# Altium PCB Control.PcbDoc
Units mm, origin at the board's own origin, x right, y up, seen from the top; angles counter-clockwise.
Board outline 152.4 x 101.6 mm, 2 copper layers (Top Layer, Bottom Layer), stack 1.569 mm thick; 43 components, 36 nets, 137 pads, 0 vias.
Unrouted connection lines stored in the file: 91.
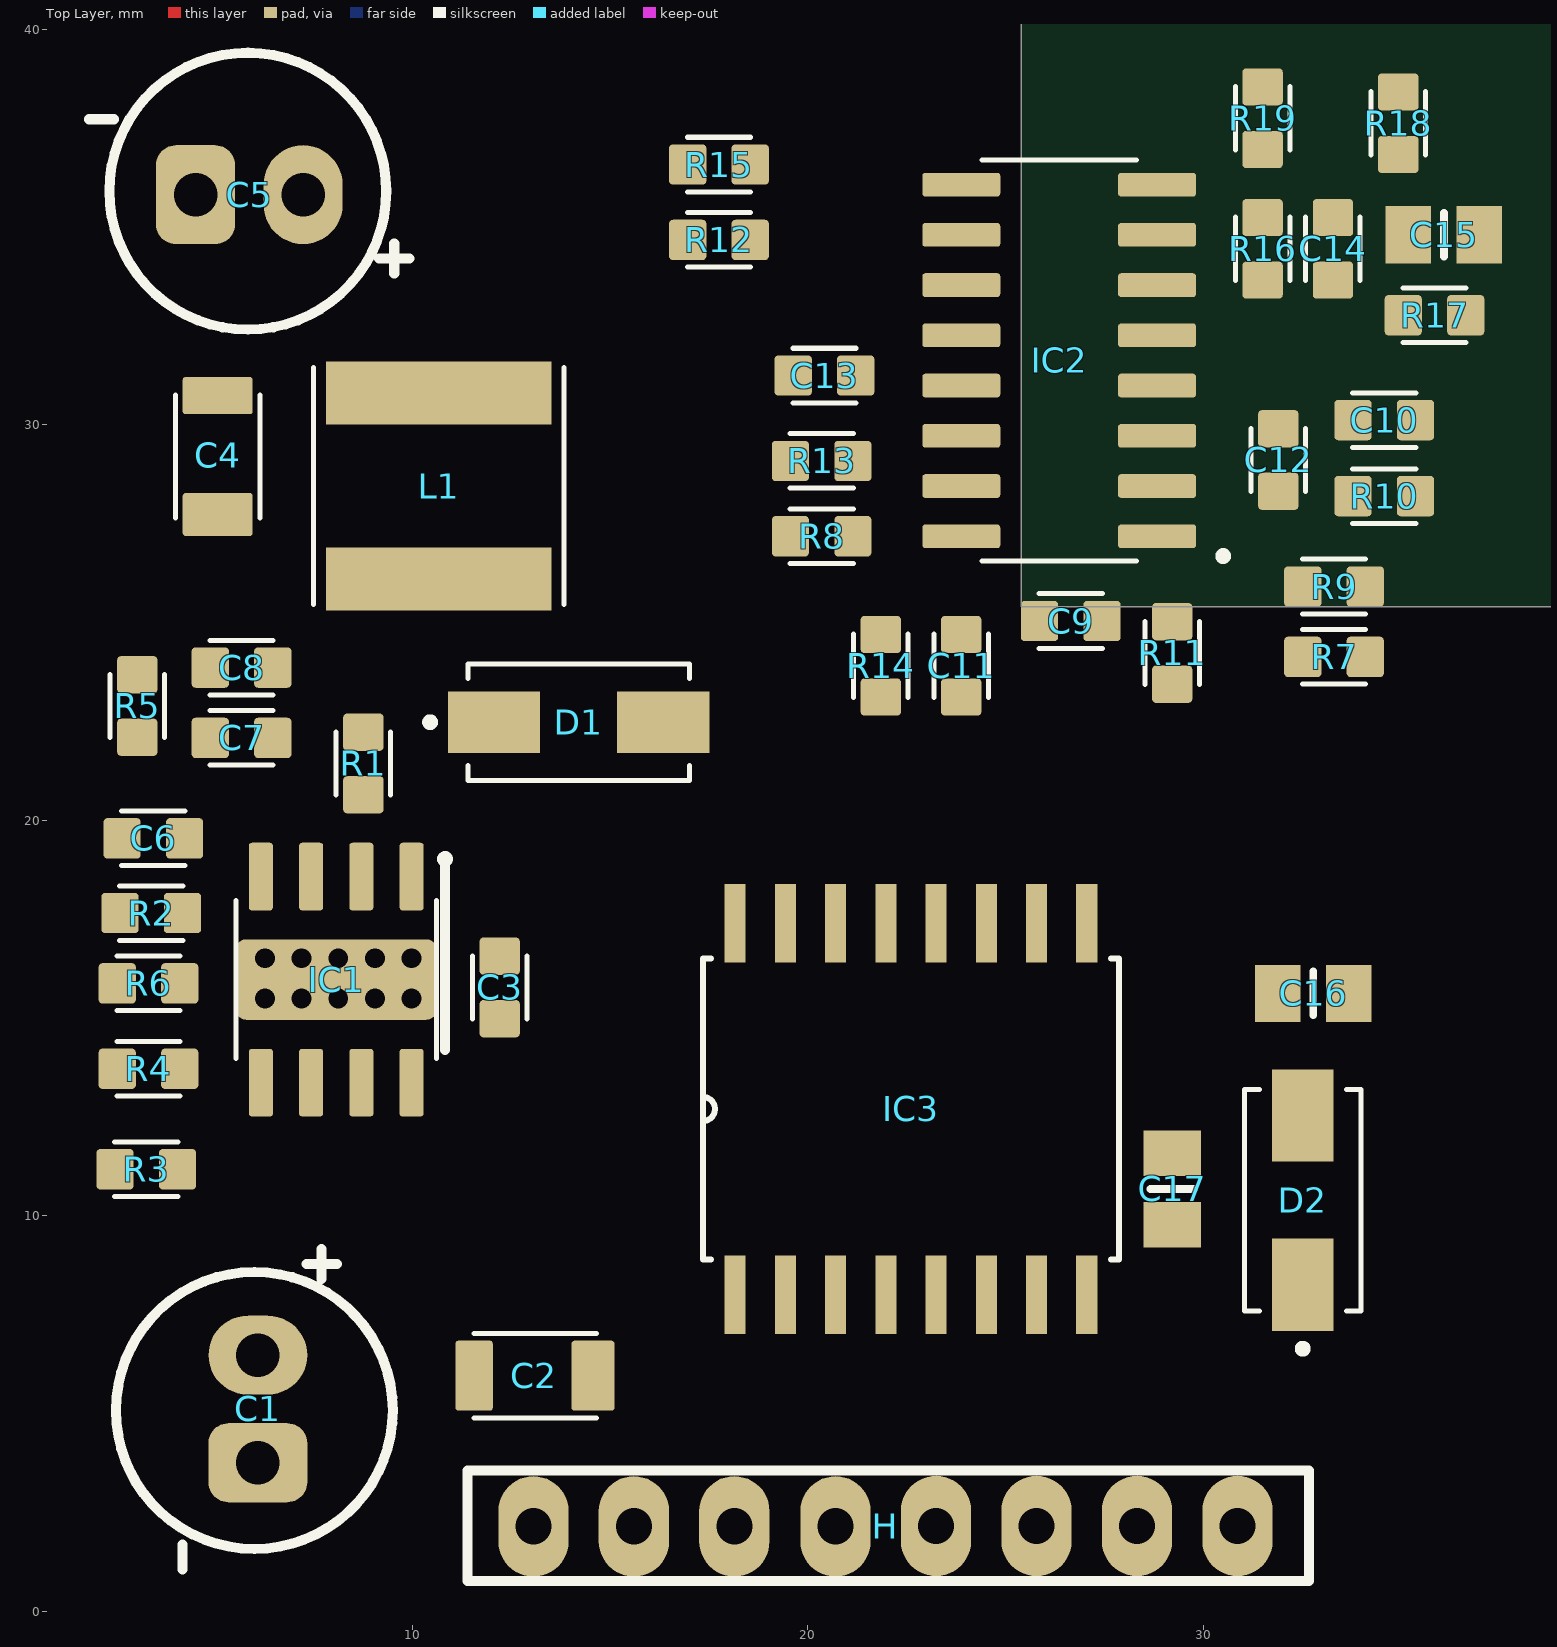
[diagram p0: Top Layer view]
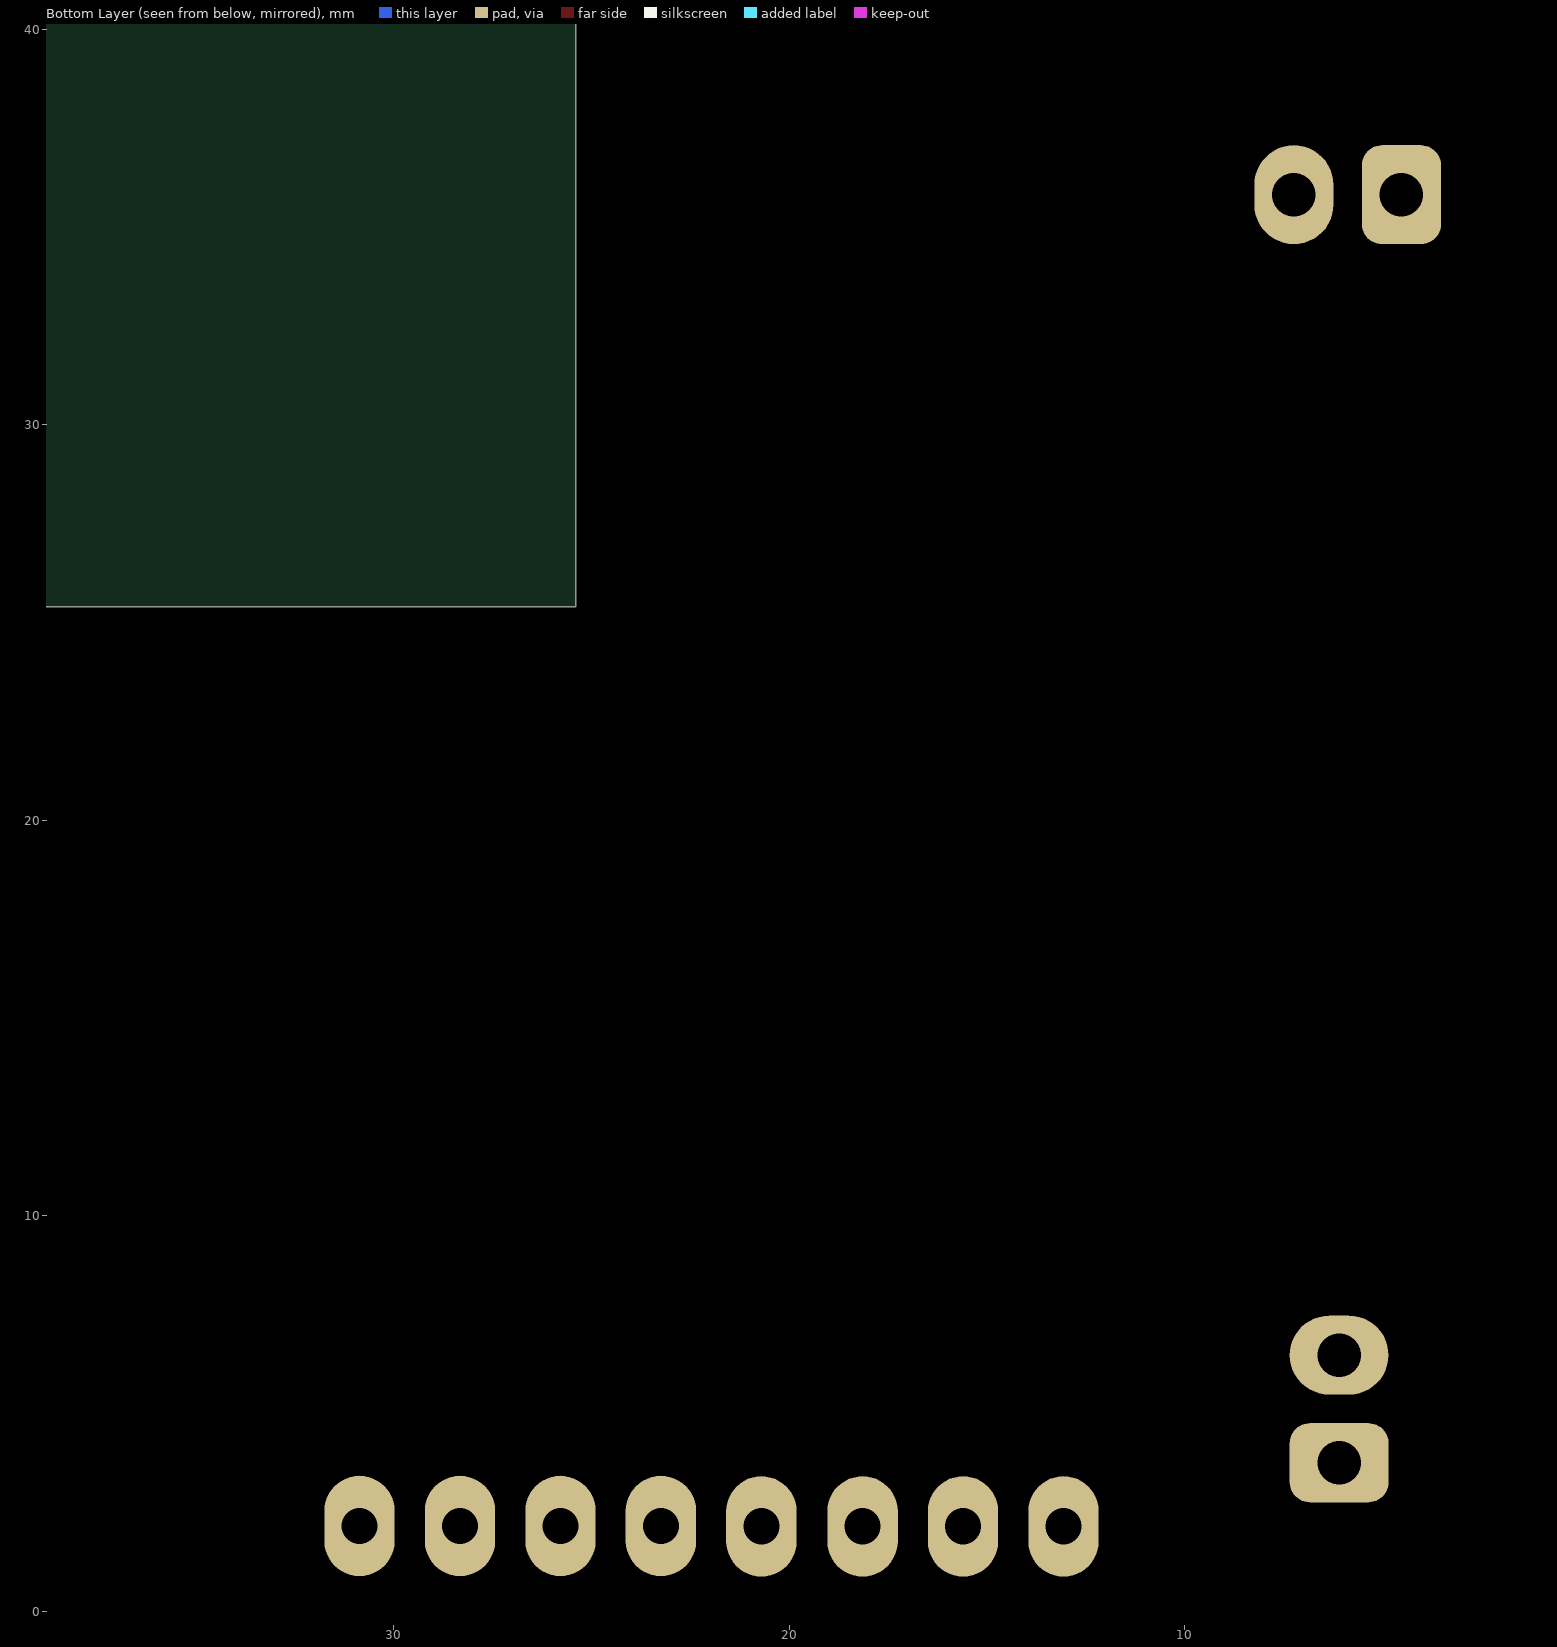
[diagram p1: Bottom Layer view, seen from below]

## Layer stack, top to bottom
Top Solder: solder mask 0.0254, SM-001, Dk 4
Top Layer: signal copper 0.035
Dielectric 1: core 1.4986, Core-043, Dk 4.3
Bottom Layer: signal copper 0.035
Bottom Solder: solder mask 0.0254, SM-001, Dk 4

## Board outline
25.4,25.4 177.8,25.4 177.8,127 25.4,127

## Design rules (kind name [scope] priority, off if disabled: settings)
Clearance [All] p1: gap=0.254 ignorepadtopadclearanceinfootprint=FALSE except(0: Arc-Hole Track-Hole SMDPad-Hole THPad-Hole Via-Hole Fill-Hole Poly-Hole Region-Hole Text-Hole)
PolygonConnect [All] p1: connectstyle=Relief reliefconductorwidth=0.254 reliefentries=4 polygonreliefangle="90 Angle" airgapwidth=0.254
RoutingVias [All] p1: holewidth=0.711 width=1.27 viastyle="Through Hole" minholewidth=0.711 minwidth=1.27 maxholewidth=0.711 maxwidth=1.27
SolderMaskExpansion [All] p1: expansion=0.102 istentingtop=FALSE
Width [All] p1: maxlimit=0.254 minlimit=0.254 preferedwidth=0.254
30 further rules are at their usual default settings.

## Classes and differential pairs
component class U_TL494: C9 C10 C11 C12 C13 C14 C15 IC2 R7 R8 R9 R10 R11 R12 R13 R14 R15 R16 R17 R18 R19
component class U_power: C1 C2 C3 C4 C5 C6 C7 C8 D1 IC1 L1 R1 R2 R3 R4 R5 R6
component class U_GATE_DRIVE: C16 C17 D2 IC3
component class Control: H

## Components (designator, comment, footprint, x,y, rotation, side; value= is the part's Value field where it differs from the comment)
C1 "100uf/35v" cap/330u/16v 6.096,3.757 r90 top
C2 "10uF" CAP-1206 13.081,6.096 r180 top
C3 "100nF" CAP-0603 12.192,15.875 r90 top
C4 "22uF" CAP-1206 5.219,29.217 r90 top
C5 "100uF" cap/330u/16v 4.519,35.814 r0 top
C6 "NU" CAP-0603 3.556,19.558 r0 top
C7 "100pF" CAP-0603 5.786,22.098 r0 top
C8 "NU" CAP-0603 5.786,23.876 r0 top
C9 "10nF" CAP-0603 26.543,25.019 r180 top
C10 "1uF" CAP-0603 34.469,30.099 r180 top
C11 "10nF" CAP-0603 23.859,24.007 r90 top
C12 "13pF" CAP-0603 31.877,29.21 r90 top
C13 "100nF" CAP-0603 20.522,31.259 r0 top
C14 "1nF" CAP-0603 33.291,34.342 r270 top
C15 "1uF" CAP-0805 37.004,34.776 r180 top
C16 "100nF" CAP-0805 31.852,15.643 r0 top
C17 "4.7uF" CAP-0805 29.232,11.604 r270 top
D1 "DSK310" DIOD/1N4007/SMD 12.046,22.479 r0 top
D2 "US1M" DIOD/1N4007/SMD 32.512,8.236 r90 top
H "pin_header_8pin" pin_header8 30.777,2.149 r180 top
IC1 "MP4560DN" SOP8_HIT 9.944,18.542 r270 top
IC2 "TL494" TL494_SMD 26.185,32.004 r180 top
IC3 "ir2113" ir2113 22.606,12.7 r90 top
L1 "68uH" NR6028T680 10.668,28.448 r90 top
R1 "47K" RES/0603 8.763,21.336 r270 top
R2 "220K" RES/0603 3.302,17.653 r180 top
R3 "220K" RES/0603 3.175,11.176 r180 top
R4 "42.2K" RES/0603 3.429,13.716 r0 top
R5 "47K" RES/0603 3.048,22.987 r90 top
R6 "42.2K" RES/0603 3.429,15.875 r0 top
R7 "5.6K" RES/0603 33.401,24.13 r0 top
R8 "1K" RES/0603 20.447,27.178 r0 top
R9 "5.6K" RES/0603 33.401,25.908 r0 top
R10 "120k" RES/0603 34.671,28.194 r0 top
R11 "5.6K" RES/0603 29.21,24.13 r270 top
R12 "1K" RES/0603 17.653,34.671 r180 top
R13 "68K" RES/0603 20.447,29.083 r0 top
R14 "680R" RES/0603 21.844,24.003 r90 top
R15 "1K" RES/0603 17.851,36.576 r0 top
R16 "22K" RES/0603 31.496,34.544 r90 top
R17 "120K" RES/0603 35.743,32.766 r180 top
R18 "10K" RES/0603 34.925,37.719 r90 top
R19 "22K" RES/0603 31.496,37.846 r90 top

## Footprints (in the part's own frame and the unit in brackets; to place one, negate y for a bottom-side part, rotate by r counter-clockwise, add the part's x,y. Pads: shape width x height; smd on the part's side, far side on the other; paste and mask are expansions set on the pad)
CAP-0603 [mm]
  rrect20% 0.94x1.02 smd: 1(-0.893,-0.017) 2(0.687,-0.017)
  silkscreen extent -0.9,-0.71 0.7,0.67, body extent -0.84,-0.44 0.76,0.46, height 0.77
CAP-0805 [mm]
  rect 1.15x1.45 smd: 1(0.025,-0.022) 2(1.825,-0.022)
  silkscreen extent 0.93,-0.57 0.93,0.53, body extent -0.17,-0.71 1.84,0.54, height 0.94
CAP-1206 [mm]
  rrect14% 1.09x1.77 smd: 1(-1.488,0.139)
  rrect14% 0.94x1.77 smd: 2(1.517,0.139)
  silkscreen extent -1.57,-0.93 1.53,1.2, body extent -1.63,-0.6 1.57,0.9, height 1.6
cap/330u/16v [mm]
  oval 2x2.5 hole 1.1: +(2.72,0)
  rrect50% 2x2.5 hole 1.1: -(0,0)
  silkscreen extent -2.7,-3.41 5.4,3.59, body extent -1.74,-3.02 4.76,3.48, height 11
DIOD/1N4007/SMD [mm]
  rect 2.33x1.56 smd: A(4.299,0) K(0.019,0)
  silkscreen extent -1.7,-1.48 4.96,1.48, body extent -0.44,-1.24 4.76,1.49, height 2.6
ir2113 [mil]
  rect 78x21 smd: 1(-185,175) 2(-185,125) 3(-185,75) 4(-185,25) 5(-185,-25) 6(-185,-75) 7(-185,-125) 8(-185,-175) 9(185,-175) 10(185,-125) 11(185,-75) 12(185,-25) 13(185,25) 14(185,75) 15(185,125) 16(185,175)
  silkscreen extent -150,-207 150,207
NR6028T680 [mm]
  rect 1.6x5.7 smd: 1(-2.35,0) 2(2.35,0)
  silkscreen extent -3,-3.17 3,3.17, body extent -3,-3 3,3, height 2.8
pin_header8 [mil]
  oval 70x100 hole 36: 1(-3.33,-0.39) 2(96.67,-0.39) 3(196.67,-0.39) 4(296.67,-0.39) 5(396.69,0) 6(497.44,-0.01) 7(597.44,0) 8(697.44,0)
  silkscreen extent -75,-55 763,55
RES/0603 [mm]
  rrect20% 0.94x1.02 smd: 1(-0.889,0) 2(0.691,0)
  silkscreen extent -0.9,-0.69 0.7,0.69, body extent -0.93,-0.41 0.67,0.39, height 0.43
SOP8_HIT [mm]
  rrect25% 1.71x0.61 smd: 1(-0.034,0.038) 2(-0.034,-1.232) 3(-0.034,-2.502) 4(-0.034,-3.772) 5(5.176,-3.772) 6(5.176,-2.502) 7(5.176,-1.232) 8(5.176,0.038)
  round 0 hole 0.5: 5(2.032,-0.889) 5(2.032,0.038) 5(2.032,-2.743) 5(2.032,-1.816) 5(2.032,-3.67) 5(3.048,-0.889) 5(3.048,0.038) 5(3.048,-2.743) 5(3.048,-1.816) 5(3.048,-3.67)
  rrect25% 2.032x5.08 smd: 5(2.571,-1.867)
  silkscreen extent -0.58,-4.4 4.57,0.98, body extent -0.43,-4.32 5.57,0.58, height 1.75
TL494_SMD [mm]
  rrect25% 1.97x0.6 smd: 1(-2.644,4.826) 2(-2.644,3.556) 3(-2.644,2.286) 4(-2.644,1.016) 5(-2.644,-0.254) 6(-2.644,-1.524) 7(-2.644,-2.794) 8(-2.644,-4.064) 9(2.306,-4.064) 10(2.306,-2.794) 11(2.306,-1.524) 12(2.306,-0.254) 13(2.306,1.016) 14(2.306,2.286) 15(2.306,3.556) 16(2.306,4.826)
  silkscreen extent -4.41,-4.68 1.78,5.45

## Part data
C1 C5: library part cap-electrolit
C2 C3 C4 C6 C7 C8 C9 C10 C11 C12 C13 C14 C15 C16 C17: library part cap_smd
D1 D2: library part DIOD/RECTIFIERS
L1: library part inductor
R1 R2 R3 R4 R5 R6 R7 R8 R9 R10 R11 R12 R13 R14 R15 R16 R17 R18 R19: library part RES/SMD

## Nets (pads, with @x,y where several pads share a name; then routed paths per layer and width w, separated by ;. In a path a pad name is that pad's centre, name@x,y a point inside that pad or via, vN(x,y) a via of type N, cw(c..) or ccw(c..) an arc to the next point about the centre after c; other vN are vias at no path point)
+5: C13.2 C15.1 IC2.13 IC2.14 R7.2 R13.1 R17.1
+12: C4.2 C5.+ C6.1 C16.1 D2.A IC2.8 IC2.11 IC2.12 IC3.3 IC3.11 L1.2 R2.2
+24: C1.+ C2.1 H.7 IC1.7 R1.1
FB_C: H.2 R14.1
FB_V: H.1 IC2.1
GND: C1.- C2.2 C4.1 C5.- C8.1 C13.1 C14.1 C16.2 D1.A H.8 IC1.5 IC2.7 IC3.2 IC3.15 R3.2 R4.1 R5.2 R6.1 R8.1 R9.2 R12.2 R15.1 R18.2 R19.2
H_IN: IC2.9 IC3.12 R15.2
HO: H.5 IC3.8
L_IN: IC2.10 IC3.14 R12.1
LO: H.6 IC3.1
NetC3_1: C3.1 IC1.8
NetC3_2: C3.2 D1.K IC1.1 L1.1
NetC6_2: C6.2 IC1.4 R2.1 R4.2 R6.2
NetC7_1: C7.1 R5.1
NetC7_2: C7.2 C8.2 IC1.3
NetC9_1: C9.1 C10.2 C12.2 IC2.3 R11.1
NetC9_2: C9.2 C11.2 IC2.15 R13.2 R14.2
NetC10_1: C10.1 R10.2
NetC11_1: C11.1 R11.2
NetC12_1: C12.1 IC2.2 R7.1 R9.1 R10.1
NetC14_2: C14.2 IC2.5
NetC15_2: C15.2 IC2.4 R17.2 R18.1
NetC17_2: C17.2 D2.K IC3.7
NetH_3: H.3
NetIC1_2: IC1.2 R1.2
NetIC1_6: IC1.6 R3.1
NetIC2_6: IC2.6 R16.1
NetIC2_16: IC2.16 R8.2
NetIC3_4: IC3.4
NetIC3_5: IC3.5
NetIC3_9: IC3.9
NetIC3_10: IC3.10
NetIC3_16: IC3.16
NetR16_2: R16.2 R19.1
SD: IC3.13
VS: C17.1 H.4 IC3.6